# Altium PCB Controle_Motor.PcbDoc
Units mm, origin at the board's own origin, x right, y up, seen from the top; angles counter-clockwise.
Board outline 60.07 x 120.14 mm, 2 copper layers (Top Layer, Bottom Layer); 23 components, 21 nets, 95 pads, 4 vias.
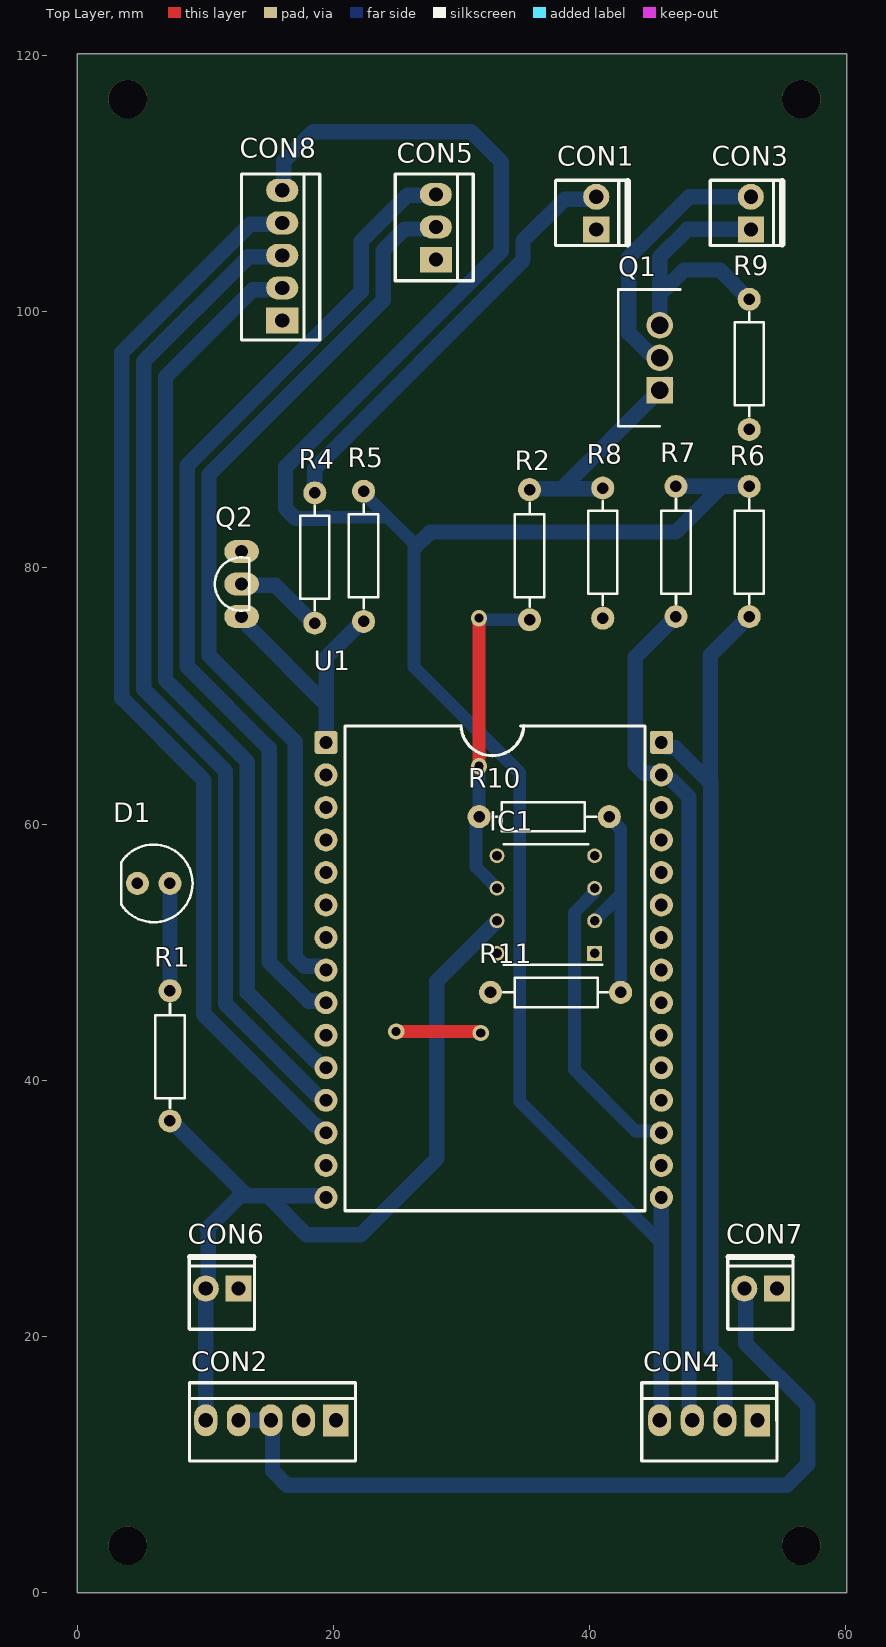
[diagram p0: Top Layer view]
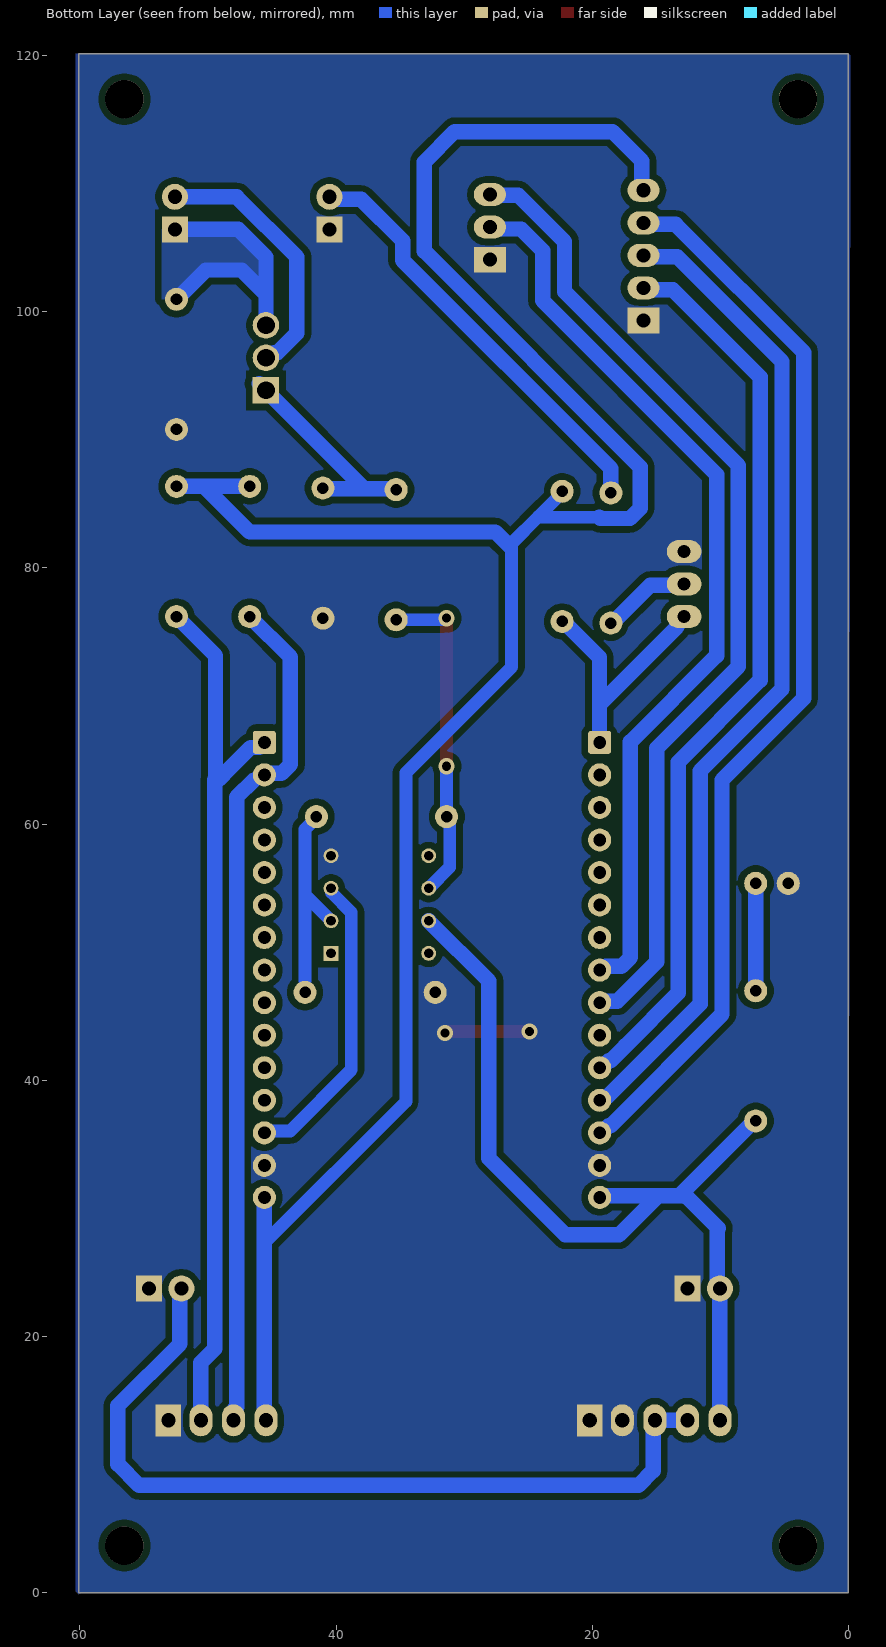
[diagram p1: Bottom Layer view, seen from below]

## Layer stack, top to bottom
Top Solder: solder mask 0.0102, Solder Resist, Dk 3.5
Top Layer: signal copper 0.0356
Dielectric 1: dielectric 0.32, FR-4, Dk 4.8
Bottom Layer: signal copper 0.0356
Bottom Solder: solder mask 0.0102, Solder Resist, Dk 3.5

## Board outline
0,0 60.071,0 60.071,120.142 0,120.142

## Design rules (kind name [scope] priority, off if disabled: settings)
Clearance [All] p1: gap=0.5 ignorepadtopadclearanceinfootprint=FALSE except(0: Arc-Text Arc-Hole Track-Text Track-Hole SMDPad-Text SMDPad-Hole THPad-Text THPad-Hole Via-Text Via-Hole Fill-Text Fill-Hole Poly-Text Poly-Hole Region-Text Region-Hole Text-Text Text-Hole)
ComponentClearance [All] p1: gap=0.3 collisioncheckmode=3 verticalgap=0.254 showdistances=FALSE
HoleSize [All] p1: absolutevalues=TRUE maxlimit=3 minlimit=0.75 maxpercent=80.000 minpercent=20.000
HoleToHoleClearance [All] p1: gap=0.1 allowstackedmicrovias=TRUE
MinimumSolderMaskSliver [All] p1: minsoldermaskwidth=0.05
PolygonConnect [All] p1: connectstyle=Relief reliefconductorwidth=0.254 reliefentries=4 polygonreliefangle="90 Angle" airgapwidth=0.254
RoutingVias [All] p1: holewidth=0.9 width=2 viastyle="Through Hole" minholewidth=0.9 minwidth=2 maxholewidth=0.9 maxwidth=2
SilkToSilkClearance [All] p1: silktosilkclearance=0
SilkToSolderMaskClearance [IsPad] p1: minsilkscreentomaskgap=0 clearancetoexposedcopper=TRUE
SolderMaskExpansion [All] p1: expansion=0.102 istentingtop=FALSE
Width [All] p1: maxlimit=4 minlimit=0.5 preferedwidth=1 minimp=50.000000 maximp=50.000000 favimp=50.000000
24 further rules are at their usual default settings.

## Components (designator, comment, footprint, x,y, rotation, side; value= is the part's Value field where it differs from the comment)
CON1 "KK_2.54_2vias" KK_2VIAS_180º 40.513,106.426 r90 top
CON2 "KK_2.54_5vias" KK_5vias_180° 20.193,13.462 r180 top
CON3 "KK_2.54_2vias" KK_2VIAS_180º 52.578,106.426 r90 top
CON4 "KK_2.54_4vias" KK_4vias_180° 53.086,13.462 r180 top
CON5 "KK_2.54_3vias" KK_3vias_180º 27.99,104.063 r90 top
CON6 "KK_2.54_2vias" KK_2VIAS_180º 12.573,23.749 r180 top
CON7 "KK_2.54_2vias" KK_2VIAS_180º 54.61,23.749 r180 top
CON8 "KK_2.54_5vias" KK_5vias_180° 16.002,99.314 r90 top
D1 "LED 5MM RED" "LED 5MM RED" 5.969,55.372 r180 top
IC1 "LM741IN" DIP762W56P254L920H508Q8N 36.576,53.721 r180 top
Q1 "IRFZ44NPBF" TO254P483X1016X1994-3P 45.466,93.853 r90 top
Q2 "BC549" TO92 12.827,78.74 r90 top
R1 "RES 470R 1/4W CARBON FILM" "RES 470R 1/4W CARBON FILM" 7.239,41.91 r270 top
R2 "RES 470R 1/4W CARBON FILM" "RES 470R 1/4W CARBON FILM" 35.306,81.026 r270 top
R4 "RES 470R 1/4W CARBON FILM" "RES 470R 1/4W CARBON FILM" 18.542,80.772 r90 top
R5 "RES 470R 1/4W CARBON FILM" "RES 470R 1/4W CARBON FILM" 22.352,80.899 r90 top
R6 "4.7K" "RES 4.7K 1/4W CARBON FILM" 52.451,81.28 r270 top
R7 "4.7K" "RES 4.7K 1/4W CARBON FILM" 46.736,81.28 r270 top
R8 "RES 470R 1/4W CARBON FILM" "RES 470R 1/4W CARBON FILM" 41.021,81.153 r90 top
R9 "RES 470R 1/4W CARBON FILM" "RES 470R 1/4W CARBON FILM" 52.451,95.885 r90 top
R10 "47K" "RES 4.7K 1/4W CARBON FILM" 36.449,60.579 r180 top
R11 "68k" "RES 4.7K 1/4W CARBON FILM" 37.338,46.863 r0 top
U1 "microcontrolador" ESP32_Desvikit_v1 19.418,66.381 r0 top value="ESP32 Desvikit V1"

## Footprints (in the part's own frame and the unit in brackets; to place one, negate y for a bottom-side part, rotate by r counter-clockwise, add the part's x,y. Pads: shape width x height; smd on the part's side, far side on the other; paste and mask are expansions set on the pad)
DIP762W56P254L920H508Q8N [mm]
  rect 1.16x1.16 hole 0.76: 1(-3.81,3.81)
  round 1.16 hole 0.76: 2(-3.81,1.27) 3(-3.81,-1.27) 4(-3.81,-3.81) 5(3.81,-3.81) 6(3.81,-1.27) 7(3.81,1.27) 8(3.81,3.81)
  silkscreen extent -4.39,-4.7 3.3,4.7, body extent -3.95,-4.6 3.95,4.6, height 5.08
ESP32_Desvikit_v1 [mm]
  rrect25% 1.8x1.8 hole 1: 1(0,0) 30(26.175,0)
  round 1.8 hole 1: 2(0,-2.54) 3(0,-5.08) 4(0,-7.62) 5(0,-10.16) 6(0,-12.7) 7(0,-15.24) 8(0,-17.78) 9(0,-20.32) 10(0,-22.86) 11(0,-25.4) 12(0,-27.94) 13(0,-30.48) 14(0,-33.02) 15(0,-35.52) 16(26.175,-35.52) 17(26.175,-33.02) 18(26.175,-30.48) 19(26.175,-27.94) 20(26.175,-25.4) 21(26.175,-22.86) 22(26.175,-20.32) 23(26.175,-17.78) 24(26.175,-15.24) 25(26.175,-12.7) 26(26.175,-10.16) 27(26.175,-7.62) 28(26.175,-5.08) 29(26.175,-2.54)
  silkscreen extent 1.47,-36.57 24.9,1.31, body extent -1.2,-46.07 27.48,4.86, height 16.2
KK_2VIAS_180º [mil]
  rect 80x80 hole 43.31: 1(0,0)
  round 80 hole 43.31: 2(100,0)
  silkscreen extent -50,-101 151,125, body extent -61,-108 165,128, height 464
KK_3vias_180º [mm]
  rect 2x2.5 hole 1.1: 1(0,0)
  oval 1.8x2.5 hole 1.1: 2(2.54,0) 3(5.08,0)
  silkscreen extent -1.65,-2.92 6.69,3.18, body extent -1.6,-2.95 6.69,3.05, height 11.9
KK_4vias_180° [mm]
  rect 2x2.5 hole 1.1: 1(0,0)
  oval 1.8x2.5 hole 1.1: 2(2.54,0) 3(5.08,0) 4(7.62,0)
  silkscreen extent -1.53,-2.92 9.02,3.18, body extent -1.4,-2.79 8.76,3.01, height 10.12
KK_5vias_180° [mm]
  rect 2x2.5 hole 1.1: 1(0,0)
  oval 1.8x2.5 hole 1.1: 2(2.54,0) 3(5.08,0) 4(7.62,0) 5(10.16,0)
  silkscreen extent -1.53,-2.92 11.43,3.18, body extent -1.4,-2.79 11.3,3.01, height 10.12
"LED 5MM RED" [mm]
  round 1.8 hole 0.9: 1(-1.27,0) 2(1.27,0)
  silkscreen extent -3.03,-3.03 2.54,3.03, body extent -2.98,-3.01 2.44,3.01, height 9.31
"RES 4.7K 1/4W CARBON FILM" [mm]
  round 1.8 hole 0.9: 1(-5.08,0) 2(5.08,0)
  silkscreen extent -4.06,-1.14 4.06,1.14, body extent -5.47,-1.27 5.47,1.27, height 3.27
"RES 470R 1/4W CARBON FILM" [mm]
  round 1.8 hole 0.9: 1(-5.08,0) 2(5.08,0)
  silkscreen extent -4.06,-1.14 4.06,1.14, body extent -5.47,-1.27 5.47,1.27, height 3.27
TO92 [mm]
  oval 1.8x2.7 hole 1: 1(-2.54,0) 2(0,0) 3(2.54,0)
  silkscreen extent -2.09,-0.6 2.09,2.08, body extent -2.74,-0.57 2.74,2.04, height 6.83
TO254P483X1016X1994-3P [mm]
  rect 2.07x2.07 hole 1.38: 1(0,0)
  round 2.07 hole 1.38: 2(2.54,0) 3(5.08,0)
  silkscreen extent -2.8,-1.61 7.88,3.22, body extent -2.54,-1.61 7.62,3.22, height 18.86

## Part data
CON1 CON3 CON6 CON7: "Conector KK 2.54mm 2 vias", Descrição="Conector KK 3 vias com passo 2.54mm", Encapsulamento="PTH - 180º", Modelo="2 vias - 180º", Valor="KK 2 vias 180º"
CON2 CON8: "Conector KK 2.54mm 5 vias", Descrição="Conector KK 3 vias com passo 2.54mm", Encapsulamento="PTH - 180º", Modelo="3 vias - 180º", Valor="KK 5 vias 180º"
CON4: "Conector KK 2.54mm 4 vias", Descrição="Conector KK 3 vias com passo 2.54mm", Encapsulamento="PTH - 180º", Modelo="3 vias - 180º", Valor="KK 4 vias 180º"
CON5: "Conector KK 2.54mm 3 vias", Descrição="Conector KK 3 vias com passo 2.54mm", Encapsulamento="PTH - 180º", Modelo="3 vias - 180º", Valor="KK 3 vias 180º"
D1: Current If Luminous Intensity=2, Forward Current If=20, Forward Voltage VF Max=2.5, LED Colour=Red, Manufacturer=Paralight, Manufacturer Part Number=IMP585, Operating Temperature Max=85, Operating Temperature Min=-40, Operating Temperature Range="-40°C to +85", Peak Forward Current=7, Supplier Part Number 1="Led 3mm Vermelho Difuso L-314HD - Paralight", Voltage Vf Typ="2.2V<!--FANDB--><div class=\"features-and-benefits-container\"><div class=\"features-and-benefits-description\"><span class=\"features-benefits-value\">The L-934LID from Kingbright is a through hole round shape high efficiency red colour LED. The device is made of gallium arsenide phosphide on gallium phosphide orange light emitting diode. This LED is widely used because of low power consumption, long life and solid state reliability.</span></div><div class=\"features-and-benefits-list\"><ul class=\"features-and-benefits-list-list\"><li class=\"features-and-benefits-list-item\">Standard bulb size of T-1 (3mm)</li><li class=\"features-and-benefits-list-item\">Reliable and rugged</li><li class=\"features-and-benefits-list-item\">Viewing angle is 60°</li><li class=\"features-and-benefits-list-item\">Luminous intensity of 3mcd at 2mA</li><li class=\"features-and-benefits-list-item\">Forward voltage is 2.0V</li><li class=\"features-and-benefits-list-item\">Forward current (If) is 20mA</li><li class=\"features-and-benefits-list-item\">Dominant wavelength is 625nm at IF=20mA</li><li class=\"features-and-benefits-list-item\">Peak wavelength is 627nm at IF=20", Bulb Size=3mm, ComponentLink1Description=http://loja.multcomercial.com.br/led-3mm-vermelho-difuso-l-314hd-paralight.html, ComponentLink1URL=http://loja.multcomercial.com.br/led-3mm-vermelho-difuso-l-314hd-paralight.html, Dominant Wavelength=625, External Diameter=2.9, External Length / Height=4.6, Forward Current If Max=20, Forward Voltage=2, Lead Cross-section Depth=0.5, Lead Cross-section Width=0.5, Lead Spacing=2.54, LED / Lamp Size="3mm / T-1", LED Mounting="Through Hole", LED Type=Standard, Lens Shape=Round, Luminous Intensity=3, Luminous Intensity @ If Min=0.7, Luminous Intensity Typ=3, Mounting Type="PCB Through Hole", MSL=-, No. of Pins=2, Packaging=Each, Peak Wavelength=625, PIV Max=5, Pricing 1="1=0.15 (BRL)", RoHS=YES, Stock 1=35260, Supplier 1="Mult Comercial", SVHC="No SVHC (15-Jun-2015)", Viewing Angle=60°, Wavelength Typ=625
IC1: "Integrated Circuit", Manufacturer_Name="ON Semiconductor", Mouser Part Number=512-LM741IN, Datasheet Link=http://www.mouser.com/datasheet/2/308/Fairchild_LM741-1191822.pdf, Height=5.08mm, Manufacturer_Part_Number=LM741IN, Mouser Price/Stock=https://www.mouser.com/Search/Refine.aspx?Keyword=512-LM741IN
Q1: "MOSFET (N-Channel)", Manufacturer_Name=Infineon, Mouser Part Number=942-IRFZ44NPBF, Arrow Part Number=IRFZ44NPBF, Arrow Price/Stock=https://www.arrow.com/en/products/irfz44npbf/infineon-technologies-ag, Datasheet Link=https://www.infineon.com/dgdl/irfz44npbf.pdf?fileId=5546d462533600a40153563b3a9f220d, Height=4.83mm, Manufacturer_Part_Number=IRFZ44NPBF, Mouser Price/Stock=https://www.mouser.co.uk/ProductDetail/Infineon-IR/IRFZ44NPBF?qs=9%252BKlkBgLFf24zghzPg2f9g%3D%3D
Q2: "TRANS NPN 30V 0.1A TO-92", Collector- Base Voltage VCBO="30 V", Collector-Emitter Saturation Voltage="200 mV", DC Current Gain hFE Max=800, Emitter- Base Voltage VEBO="5 V", Manufacturer="Fairchild Semiconductor", Maximum DC Collector Current="0.1 A", Maximum Operating Temperature="+ 150 C", Maximum Power Dissipation="0.5 W", Minimum Operating Temperature="- 65 C", Package / Case=TO-92-3, Supplier Part Number 1=512-BC549, Brand="Fairchild Semiconductor", Collector- Emitter Voltage VCEO Max="30 V", ComponentLink1Description=https://datasheet.ciiva.com/982/bc546-982130.pdf, ComponentLink1URL=https://datasheet.ciiva.com/982/bc546-982130.pdf, ComponentLink2Description=https://datasheet.ciiva.com/17179/bc549-17179663.pdf, ComponentLink2URL=https://datasheet.ciiva.com/17179/bc549-17179663.pdf, Configuration=Single, DC Collector/Base Gain hfe Min=110, Factory Pack Quantity=2000, Gain Bandwidth Product fT="300 MHz", Manufacturer Part Number=BC549, Mounting Style="Through Hole", Packaging=Bulk, Product Category="Bipolar Transistors - BJT", RoHS=Details, Series=BC549, Supplier 1=Mouser, Transistor Polarity=NPN
R1: "RES 470R OHM 1/4W 5% CARBON FILM", Manufacturer=Ty-Ohm, Manufacturer Part Number=CR25, Operating Temperature="-55°C ~ 155°C", Package / Case=Axial, Power (Watts)="0.25W, 1/4W", Resistance (Ohms)=470R, Supplier Part Number 1="Resistor de Filme de Carbono 1/4 de Watt CR25 5% de tolerância - 0.22R Ω à 10M Ω", Temperature Coefficient="0/ -500ppm/°C", Tolerance=±5%, Category=Resistors, ComponentLink1Description=http://loja.multcomercial.com.br/resistor-de-1-4-de-watt-cr25-5-de-tolerancia.html, ComponentLink1URL=http://loja.multcomercial.com.br/resistor-de-1-4-de-watt-cr25-5-de-tolerancia.html, Composition="Carbon Film", Features="Flame Retardant Coating, Safety", Height=-, Number of Terminations=2, Packaging="Cut Tape (CT)", Pricing 1="1=0.20 (BRL)", RoHS="RoHS Compliant", Size / Dimension="0.091\" Dia x 0.256\" L (2.30mm x 6.50mm)", Stock 1=617543, Supplier 1="Mult Comercial", Supplier Device Package=Axial
R2: "RES 470R OHM 1/4W 5% CARBON FILM", Manufacturer=Ty-Ohm, Manufacturer Part Number=CR25, Operating Temperature="-55°C ~ 155°C", Package / Case=Axial, Power (Watts)="0.25W, 1/4W", Resistance (Ohms)=22R, Supplier Part Number 1="Resistor de Filme de Carbono 1/4 de Watt CR25 5% de tolerância - 0.22R Ω à 10M Ω", Temperature Coefficient="0/ -500ppm/°C", Tolerance=±5%, Category=Resistors, ComponentLink1Description=http://loja.multcomercial.com.br/resistor-de-1-4-de-watt-cr25-5-de-tolerancia.html, ComponentLink1URL=http://loja.multcomercial.com.br/resistor-de-1-4-de-watt-cr25-5-de-tolerancia.html, Composition="Carbon Film", Features="Flame Retardant Coating, Safety", Height=-, Number of Terminations=2, Packaging="Cut Tape (CT)", Pricing 1="1=0.20 (BRL)", RoHS="RoHS Compliant", Size / Dimension="0.091\" Dia x 0.256\" L (2.30mm x 6.50mm)", Stock 1=617543, Supplier 1="Mult Comercial", Supplier Device Package=Axial
R4 R5: "RES 470R OHM 1/4W 5% CARBON FILM", Manufacturer=Ty-Ohm, Manufacturer Part Number=CR25, Operating Temperature="-55°C ~ 155°C", Package / Case=Axial, Power (Watts)="0.25W, 1/4W", Resistance (Ohms)=2200R, Supplier Part Number 1="Resistor de Filme de Carbono 1/4 de Watt CR25 5% de tolerância - 0.22R Ω à 10M Ω", Temperature Coefficient="0/ -500ppm/°C", Tolerance=±5%, Category=Resistors, ComponentLink1Description=http://loja.multcomercial.com.br/resistor-de-1-4-de-watt-cr25-5-de-tolerancia.html, ComponentLink1URL=http://loja.multcomercial.com.br/resistor-de-1-4-de-watt-cr25-5-de-tolerancia.html, Composition="Carbon Film", Features="Flame Retardant Coating, Safety", Height=-, Number of Terminations=2, Packaging="Cut Tape (CT)", Pricing 1="1=0.20 (BRL)", RoHS="RoHS Compliant", Size / Dimension="0.091\" Dia x 0.256\" L (2.30mm x 6.50mm)", Stock 1=617543, Supplier 1="Mult Comercial", Supplier Device Package=Axial
R6 R7 R10 R11: library part "RES 4.7K 1/4W CARBON FILM", "RES 4.7K OHM 1/4W 5% CARBON FILM", Manufacturer=Ty-Ohm, Manufacturer Part Number=CR25, Operating Temperature="-55°C ~ 155°C", Package / Case=Axial, Power (Watts)="0.25W, 1/4W", Resistance (Ohms)=?, Supplier Part Number 1="Resistor de Filme de Carbono 1/4 de Watt CR25 5% de tolerância - 0.22R Ω à 10M Ω", Temperature Coefficient="0/ -500ppm/°C", Tolerance=±5%, Category=Resistors, ComponentLink1Description=http://loja.multcomercial.com.br/resistor-de-1-4-de-watt-cr25-5-de-tolerancia.html, ComponentLink1URL=http://loja.multcomercial.com.br/resistor-de-1-4-de-watt-cr25-5-de-tolerancia.html, Composition="Carbon Film", Features="Flame Retardant Coating, Safety", Height=-, Number of Terminations=2, Packaging="Cut Tape (CT)", Pricing 1="1=0.20 (BRL)", RoHS="RoHS Compliant", Size / Dimension="0.091\" Dia x 0.256\" L (2.30mm x 6.50mm)", Stock 1=617543, Supplier 1="Mult Comercial", Supplier Device Package=Axial
R8 R9: "RES 470R OHM 1/4W 5% CARBON FILM", Manufacturer=Ty-Ohm, Manufacturer Part Number=CR25, Operating Temperature="-55°C ~ 155°C", Package / Case=Axial, Power (Watts)="0.25W, 1/4W", Resistance (Ohms)=100k, Supplier Part Number 1="Resistor de Filme de Carbono 1/4 de Watt CR25 5% de tolerância - 0.22R Ω à 10M Ω", Temperature Coefficient="0/ -500ppm/°C", Tolerance=±5%, Category=Resistors, ComponentLink1Description=http://loja.multcomercial.com.br/resistor-de-1-4-de-watt-cr25-5-de-tolerancia.html, ComponentLink1URL=http://loja.multcomercial.com.br/resistor-de-1-4-de-watt-cr25-5-de-tolerancia.html, Composition="Carbon Film", Features="Flame Retardant Coating, Safety", Height=-, Number of Terminations=2, Packaging="Cut Tape (CT)", Pricing 1="1=0.20 (BRL)", RoHS="RoHS Compliant", Size / Dimension="0.091\" Dia x 0.256\" L (2.30mm x 6.50mm)", Stock 1=617543, Supplier 1="Mult Comercial", Supplier Device Package=Axial
U1: library part "ESP32 Desvikit v1", "microcontrolador com moculo bluethoth e wifi"

## Free pads (board coordinates)
  round 3 hole 3: 6(3.937,116.586) 6(56.515,116.586) 7(56.515,3.683) 8(3.937,3.683)

## Via types
v1: diameter 1.27, hole 0.711, Top Layer to Bottom Layer, 4 vias

## Nets (pads, with @x,y where several pads share a name; then routed paths per layer and width w, separated by ;. In a path a pad name is that pad's centre, name@x,y a point inside that pad or via, vN(x,y) a via of type N, cw(c..) or ccw(c..) an arc to the next point about the centre after c; other vN are vias at no path point)
3V3p: CON4.4 CON8.5 R5.2 R6.1 R7.1 U1.16 | length 179.7
  Bottom Layer w1: 19.465,83.947 24.116,83.947 ; R5.2@22.352,85.852 24.186,84.018 26.289,81.915 26.289,72.263 34.544,64.008 34.544,38.354 45.593,27.305 ; R5.2@22.352,85.952 R5.2 ; 26.416,81.661 26.416,81.791
  Bottom Layer w1.2: CON8.5 16.129,109.601 16.129,111.76 18.415,114.046 30.734,114.046 33.098,111.682 33.098,104.717 16.256,87.875 16.256,84.65 17.054,83.852 19.37,83.852 19.465,83.947 ; 26.416,81.661 27.559,82.804 46.736,82.804 50.292,86.36 ; CON4.4@45.593,14.478 45.593,27.305 U1.16 ; R7.1 50.292,86.36 ; R6.1 50.292,86.36
+5: CON2.3 CON2.4 CON7.2 | length 65.2
  Bottom Layer w1.2: CON2.4 CON2.3 15.24,13.335 15.24,9.525 16.383,8.382 55.372,8.382 57.023,10.033 57.023,14.605 52.194,19.434 52.194,23.625 CON7.2
+12: CON2.5 CON6.2 IC1.7 R1.2 U1.15 | length 71
  Bottom Layer w1.2: R1.2@7.236,36.96 13.081,31.115 13.043,31.096 ; CON2.5 CON6.2 10.23,23.946 10.23,28.378 10.16,28.448 12.573,30.861 12.689,30.919 ; 12.803,30.976 14.871,30.976 ; U1.15 19.303,30.976 14.871,30.976 ; IC1.7 28.067,47.752 28.067,33.909 22.098,27.94 17.907,27.94 14.871,30.976
acelerador: CON5.3 U1.9 | length 77.6
  Bottom Layer w1.2: U1.9 19.303,46.176 18.042,46.176 14.974,49.244 14.974,65.91 8.587,72.297 8.587,87.991 22.162,101.566 22.162,105.474 25.781,109.093 27.94,109.093 CON5.3
Chave_3V3: IC1.3 U1.18 | length 23.6
  Bottom Layer w1: IC1.3 40.355,54.96 40.355,54.655 38.806,53.105 38.806,40.823 43.575,36.054 45.44,36.054 U1.18
chave_5V: IC1.6 R2.2 R10.2 | length 25.9
  Top Layer w1: v1(31.369,64.516) v1(31.369,76.073)
  Bottom Layer w1: v1(31.369,64.516) R10.2 31.369,60.363 31.115,60.109 31.115,56.642 IC1.6 ; v1(31.369,76.073) 31.442,76.073 31.569,75.946 R2.2
CLK: CON8.2 U1.11 | length 71.3
  Bottom Layer w1.2: CON8.2 15.887,101.739 15.113,101.739 15.075,101.701 13.69,101.701 6.887,94.898 6.887,71.235 13.274,64.848 13.274,46.837 17.418,42.693 18.59,41.521 18.716,41.521 19.256,40.981 U1.11
en: Q2.1 R5.1 U1.1 | length 20.5
  Bottom Layer w1.2: Q2.1 13.115,76.2 13.392,75.923 13.392,75.381 19.431,69.342 ; U1.1 19.431,66.394 19.431,69.342 ; R5.1@22.352,75.934 19.431,73.013 19.431,69.342
GND: CON1.1 CON2.1 CON2.2 CON4.1 CON5.1 CON6.1 CON7.1 CON8.1 D1.2 IC1.4 Q2.3 R8.1 R9.1 R11.1 U1.14 U1.17 | length 6.7
  Top Layer w1: v1(24.892,43.815) 31.296,43.815 31.423,43.688 v1(31.496,43.688)
MISO: CON8.3 U1.12 | length 78
  Bottom Layer w1.2: CON8.3 15.887,104.279 13.356,104.279 5.187,96.11 5.187,70.531 11.574,64.144 11.574,45.957 18.79,38.741 18.956,38.741 19.256,38.441 U1.12
MOSI: CON8.4 U1.13 | length 84.4
  Bottom Layer w1.2: CON8.4 15.887,106.819 13.492,106.819 3.487,96.814 3.487,69.826 9.874,63.439 9.874,45.157 18.59,36.441 18.716,36.441 19.256,35.901 U1.13
NetCON1_2: CON1.2 R4.2 | length 33.6
  Bottom Layer w1.2: R4.2 18.542,87.757 34.798,104.013 34.798,105.537 38.03,108.769 40.316,108.769 CON1.2
NetCON3_1: CON3.1 Q1.3 R9.2 | length 22.1
  Bottom Layer w1.2: Q1.3 45.466,101.346 ; R9.2 50.165,103.251 47.371,103.251 45.466,101.346 ; CON3.1 47.625,106.426 45.466,104.267 45.466,101.346
NetCON3_2: CON3.2 Q1.2 | length 20.6
  Bottom Layer w1.2: Q1.2 45.231,96.393 44.826,96.798 44.582,96.798 43.053,98.327 43.053,104.267 47.752,108.966 CON3.2
NetD1_1: D1.1 R1.1 | length 8.4
  Bottom Layer w1.2: R1.1 D1.1
NetIC1_2: IC1.2 R10.1 R11.2 | length 16.1
  Bottom Layer w1: IC1.2 42.418,54.483 ; R10.1 41.529,60.482 42.418,59.593 42.418,54.483 ; R11.2@42.418,47.752 42.418,54.483
NetQ1_1: Q1.1 R2.1 R8.2 | length 17.4
  Bottom Layer w1.2: R2.1 35.37,86.169 37.782,86.169 ; R8.2 40.957,86.169 37.782,86.169 ; Q1.1@46.001,94.388 Q1.1 37.782,86.169
NetQ2_2: Q2.2 R4.1 | length 7
  Bottom Layer w1.2: Q2.2 12.936,78.631 15.476,78.631 18.415,75.692 R4.1
SCL_IN: CON4.2 R6.2 U1.30 | length 69.2
  Bottom Layer w1.2: U1.30 45.993,65.981 46.667,65.981 48.26,64.388 49.149,63.499 ; CON4.2 50.546,17.967 49.452,19.061 49.452,63.45 49.403,63.499 49.403,73.152 R6.2
SDA_IN: CON4.3 R7.2 U1.29 | length 65.9
  Bottom Layer w1.2: U1.29 45.478,63.956 44.264,63.956 43.561,64.659 43.561,73.025 R7.2 ; 46.413,63.44 47.752,62.101 47.752,14.49 47.891,14.351 47.891,13.577 CON4.3
volante: CON5.2 U1.8 | length 71.3
  Bottom Layer w1.2: U1.8 19.256,48.601 18.956,48.901 17.721,48.901 17.018,49.604 17.018,66.421 10.287,73.152 10.287,87.287 23.876,100.876 23.876,104.775 25.551,106.45 27.063,106.45 27.101,106.489 27.876,106.489 CON5.2
pads on no net: IC1.1 IC1.5 IC1.8 U1.2 U1.3 U1.4 U1.5 U1.6 U1.7 U1.10 U1.19 U1.20 U1.21 U1.22 U1.23 U1.24 U1.25 U1.26 U1.27 U1.28

## Polygon pours and split planes (outlines as drawn)
GND on Bottom Layer "GND_L02_P005" (solid, pour order 5): 0,0 59.944,0 60.071,-0.127 60.325,0.127 60.325,120.142 0,120.142 -0.127,120.015
NetCON3_1 on Bottom Layer "NETCON3_1_L02_P000" (solid, pour order 0): 52.451,100.965 53.594,100.965 53.594,106.426 47.625,106.426 45.466,104.267 45.466,101.346 47.371,103.251 50.165,103.251

## Text inside footprints (layer, text, board x,y; h text height)
D1: Mechanical 29 "K" at 5.334,56.896 h0.5 r180; Mechanical 29 "A" at 7.112,56.896 h0.5 r180
Q2: Mechanical 29 "1" at 11.427,75.54 h0.5 r90
R1: Mechanical 29 "1" at 6.223,45.847 h0.5 r270
R2: Mechanical 29 "1" at 34.29,84.963 h0.5 r270
R4: Mechanical 29 "1" at 19.558,76.835 h0.5 r90
R5: Mechanical 29 "1" at 23.368,76.962 h0.5 r90
R6: Mechanical 29 "1" at 51.435,85.217 h0.5 r270
R7: Mechanical 29 "1" at 45.72,85.217 h0.5 r270
R8: Mechanical 29 "1" at 42.037,77.216 h0.5 r90
R9: Mechanical 29 "1" at 53.467,91.948 h0.5 r90
R10: Mechanical 29 "1" at 40.386,61.595 h0.5 r180
R11: Mechanical 29 "1" at 33.401,45.847 h0.5